# Altium PCB breeze_pcb.PcbDoc (part 1 of 2)
Units mil, origin at the board's own origin, x right, y up, seen from the top; angles counter-clockwise.
Board outline 3667.19 x 3670.52 mil, 4 copper layers (Top Layer, GND, VCC, Bottom Layer); 124 components, 98 nets, 467 pads, 191 vias.
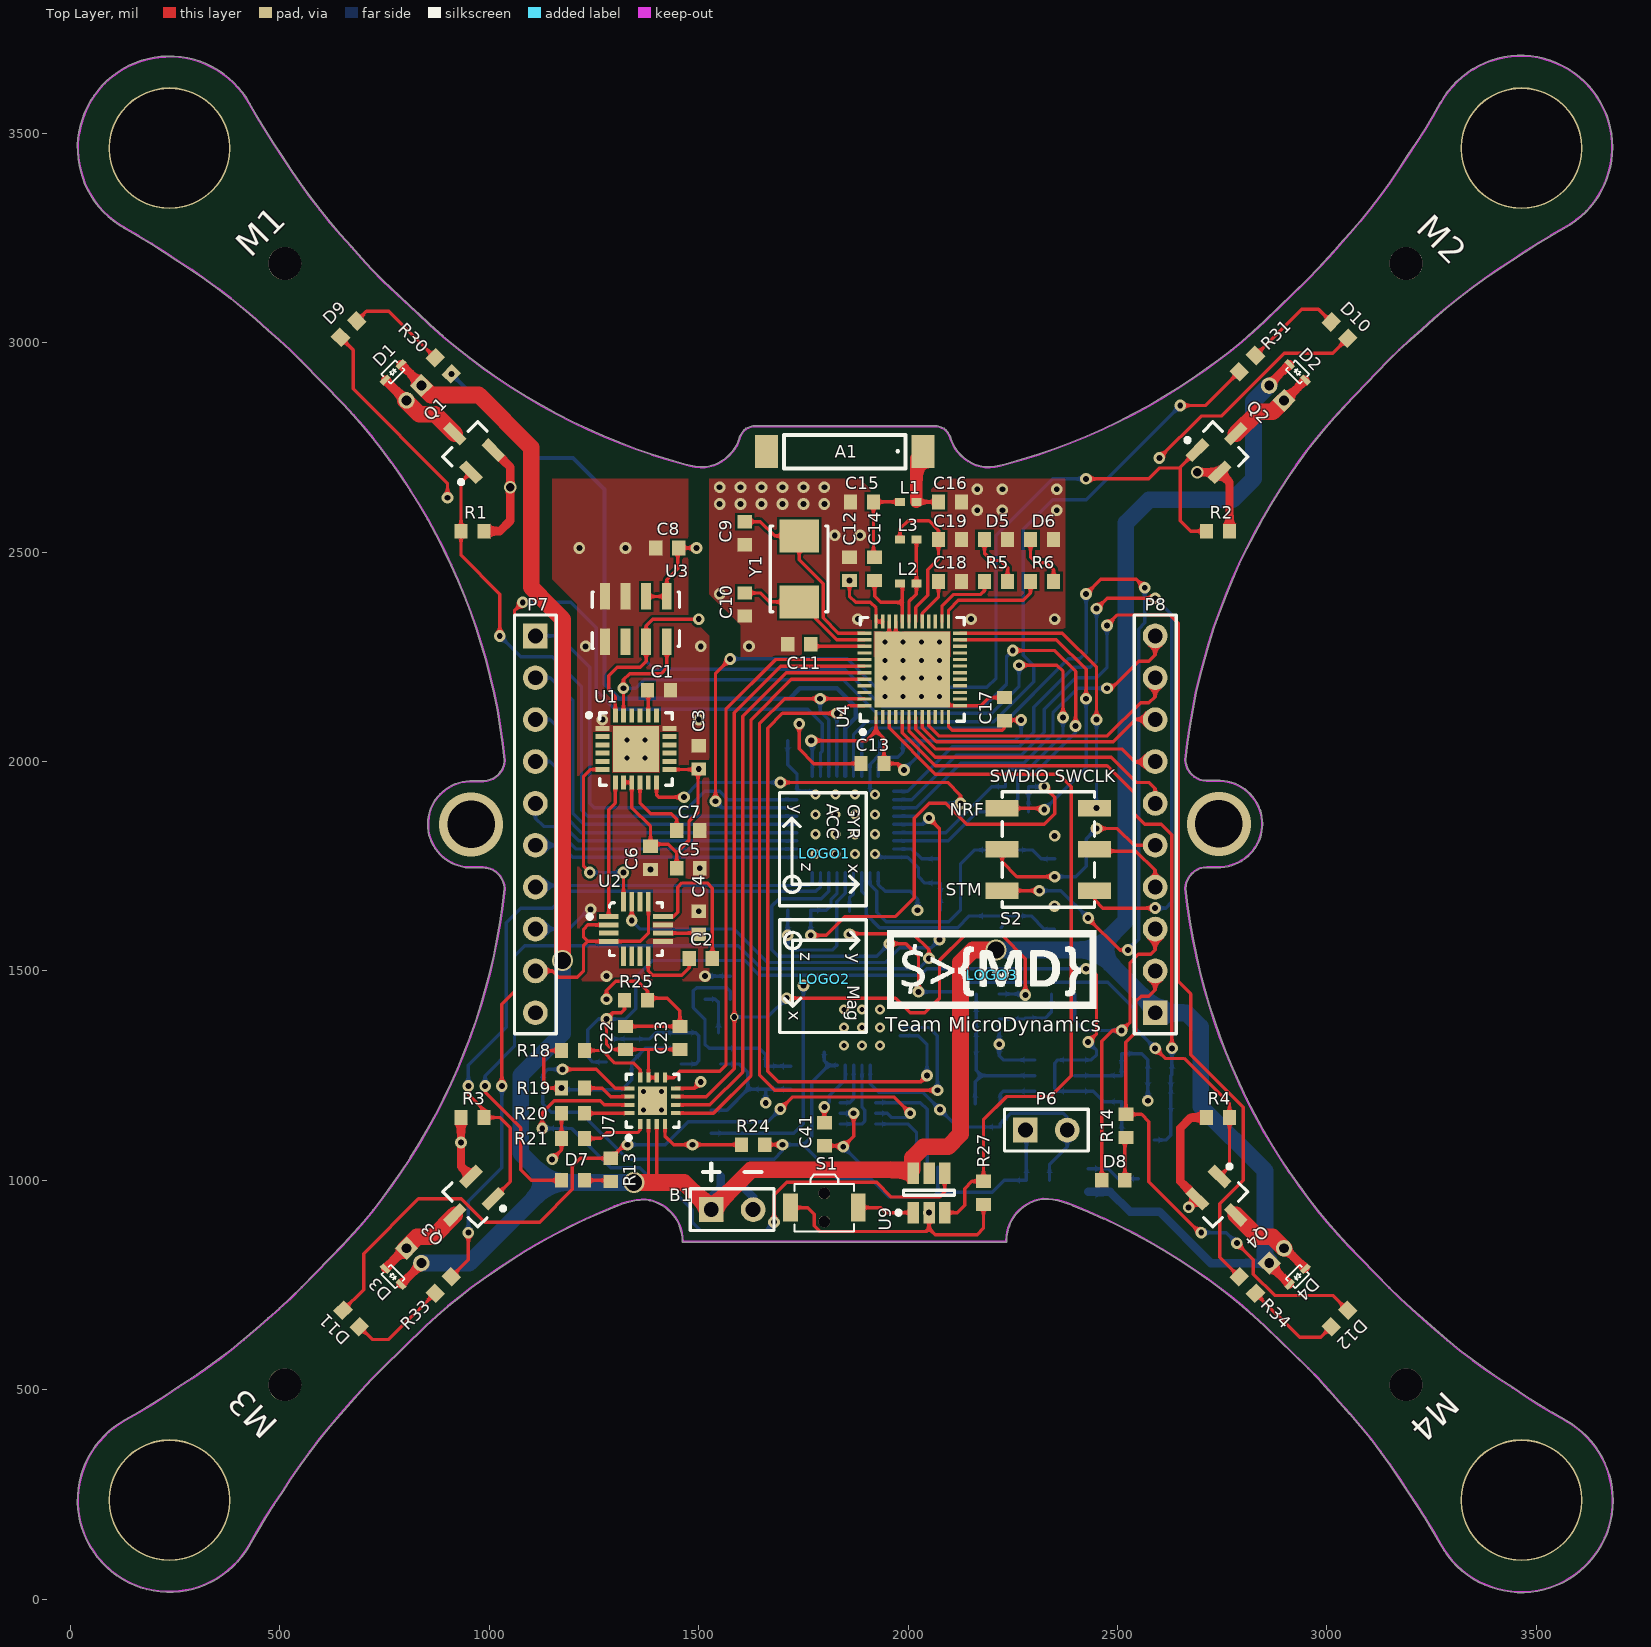
[diagram p0: Top Layer view]
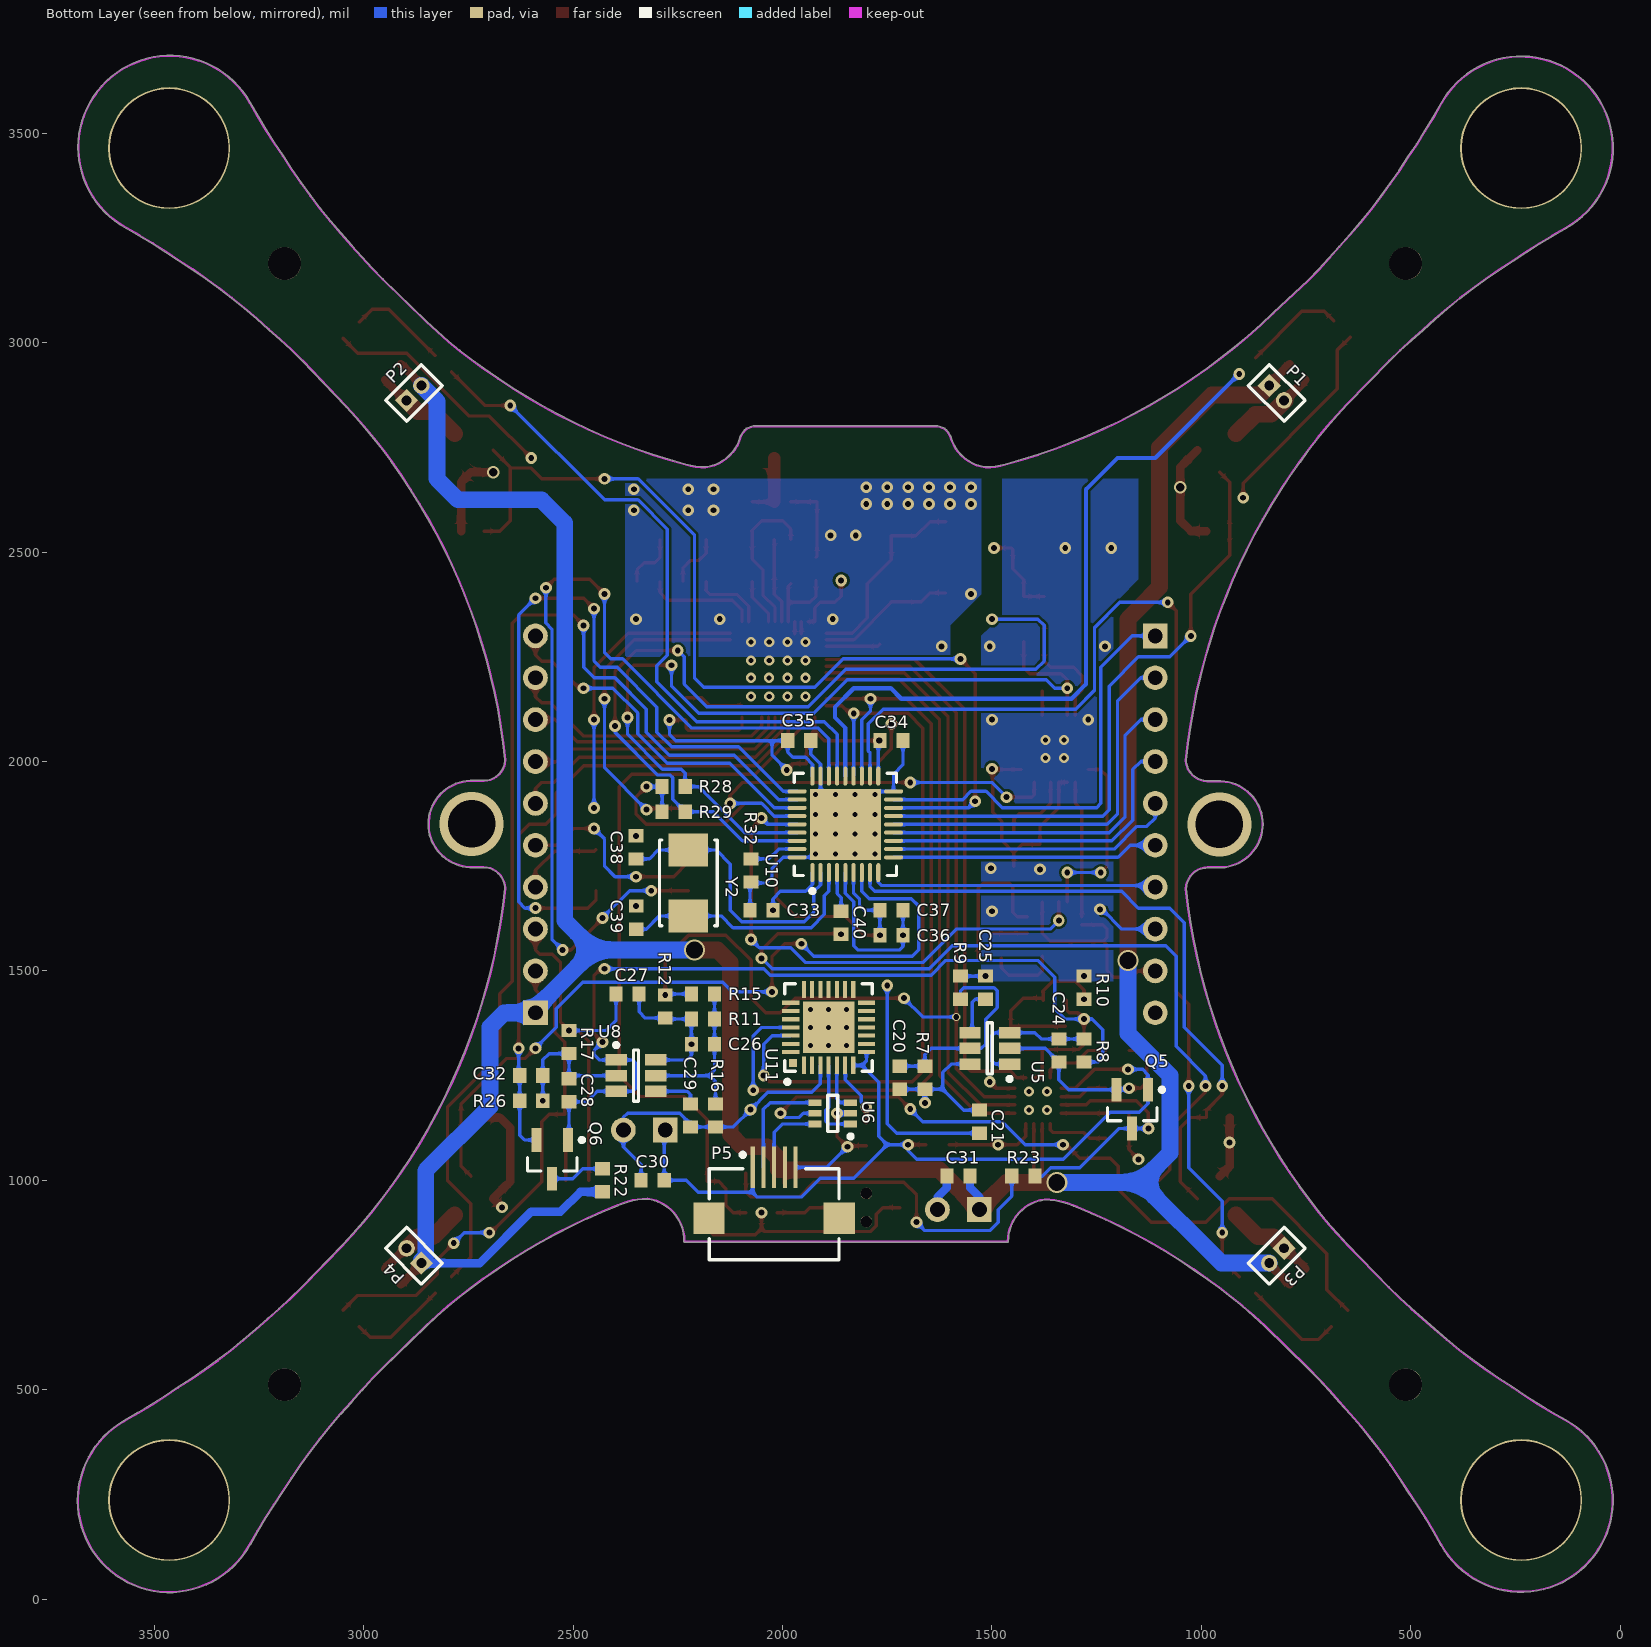
[diagram p1: Bottom Layer view, seen from below]
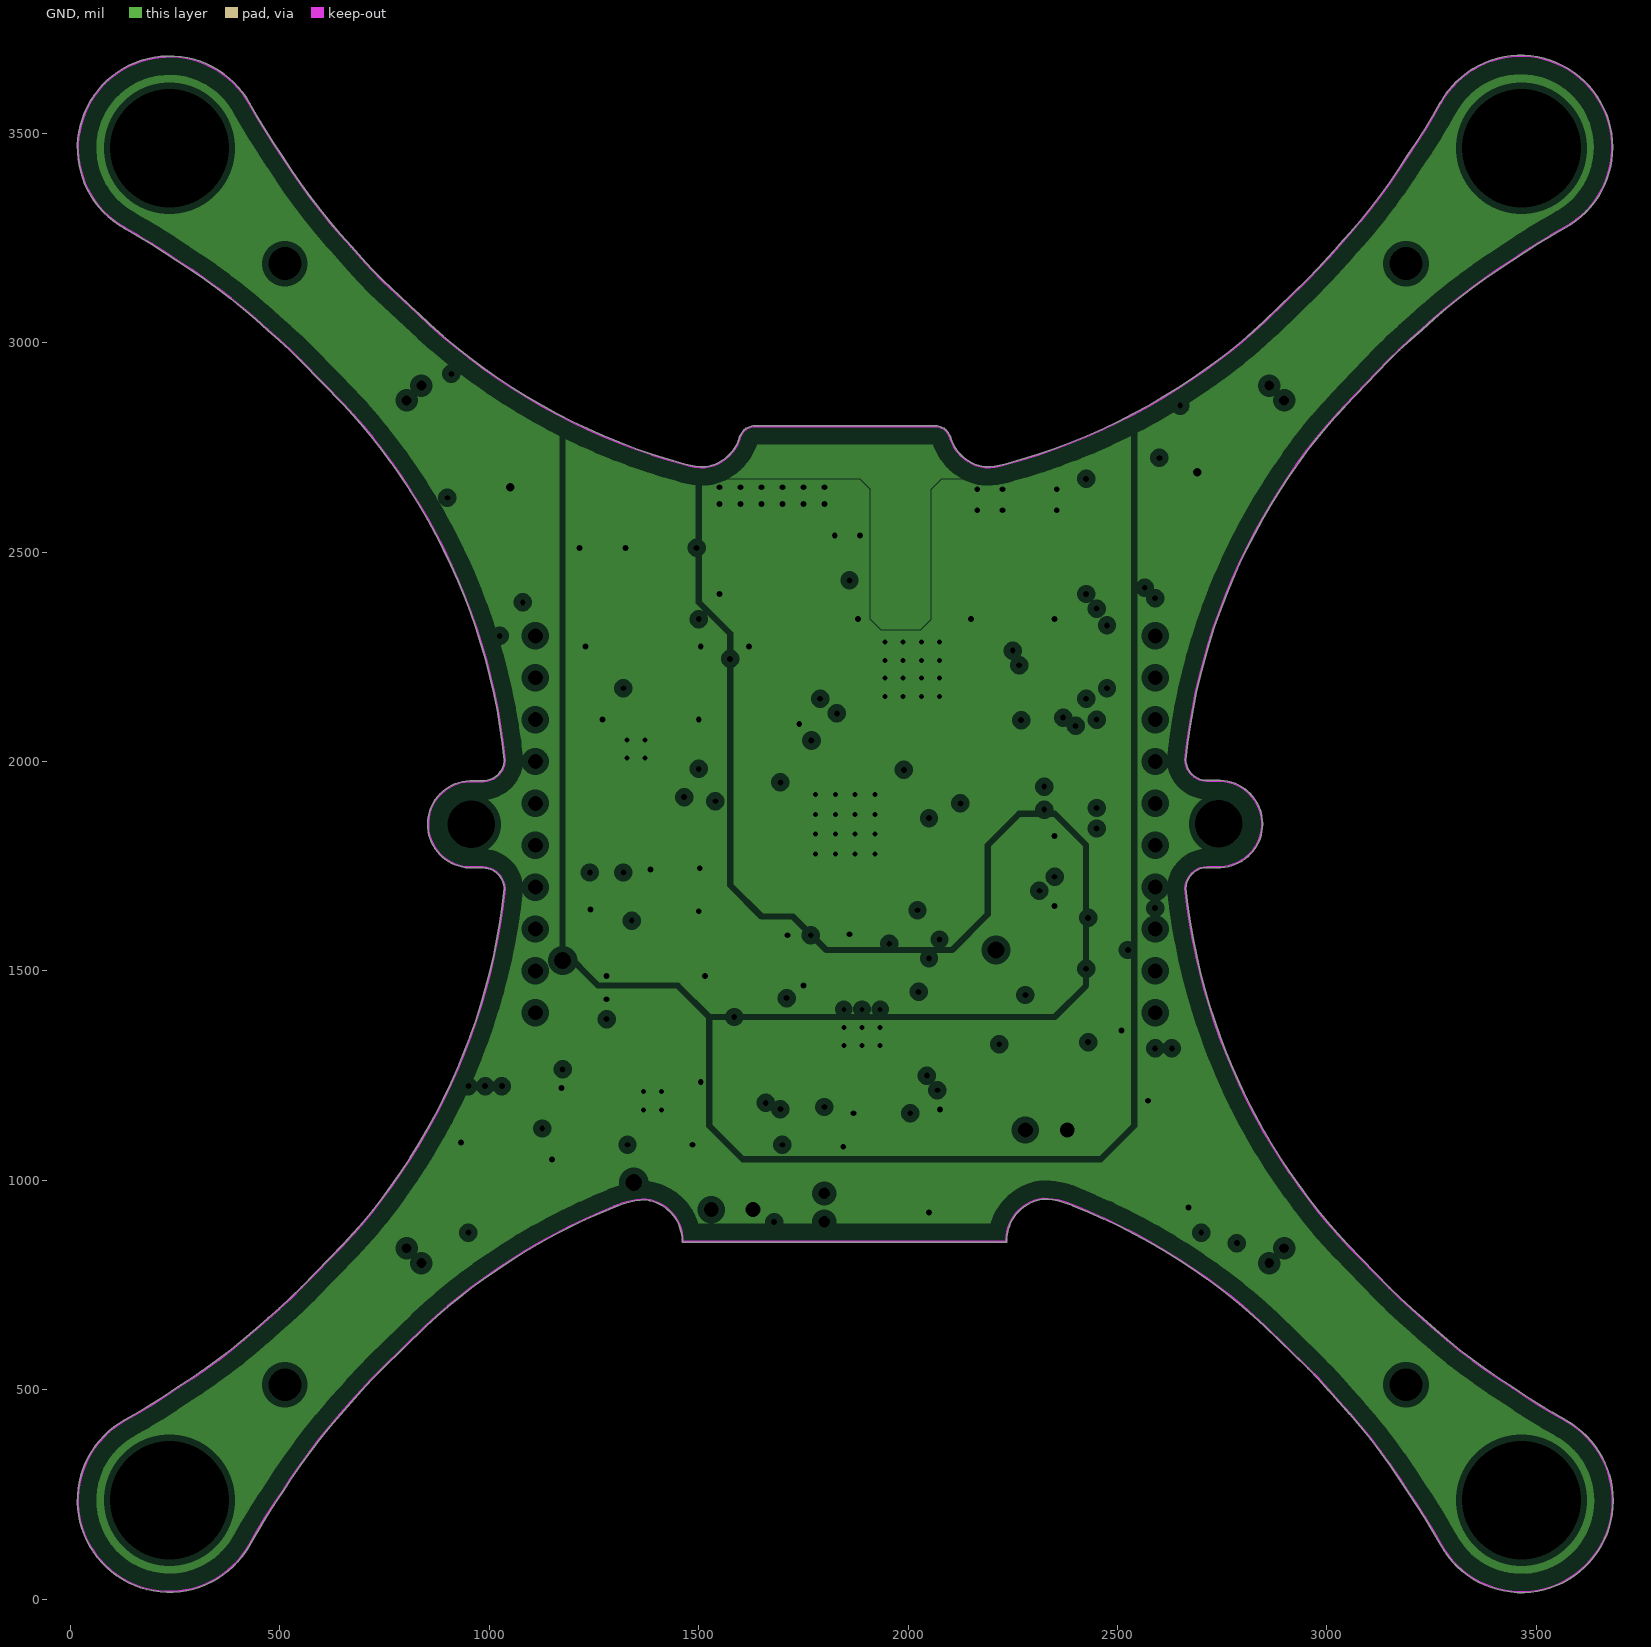
[diagram p2: GND, clearances drawn from the general rule]
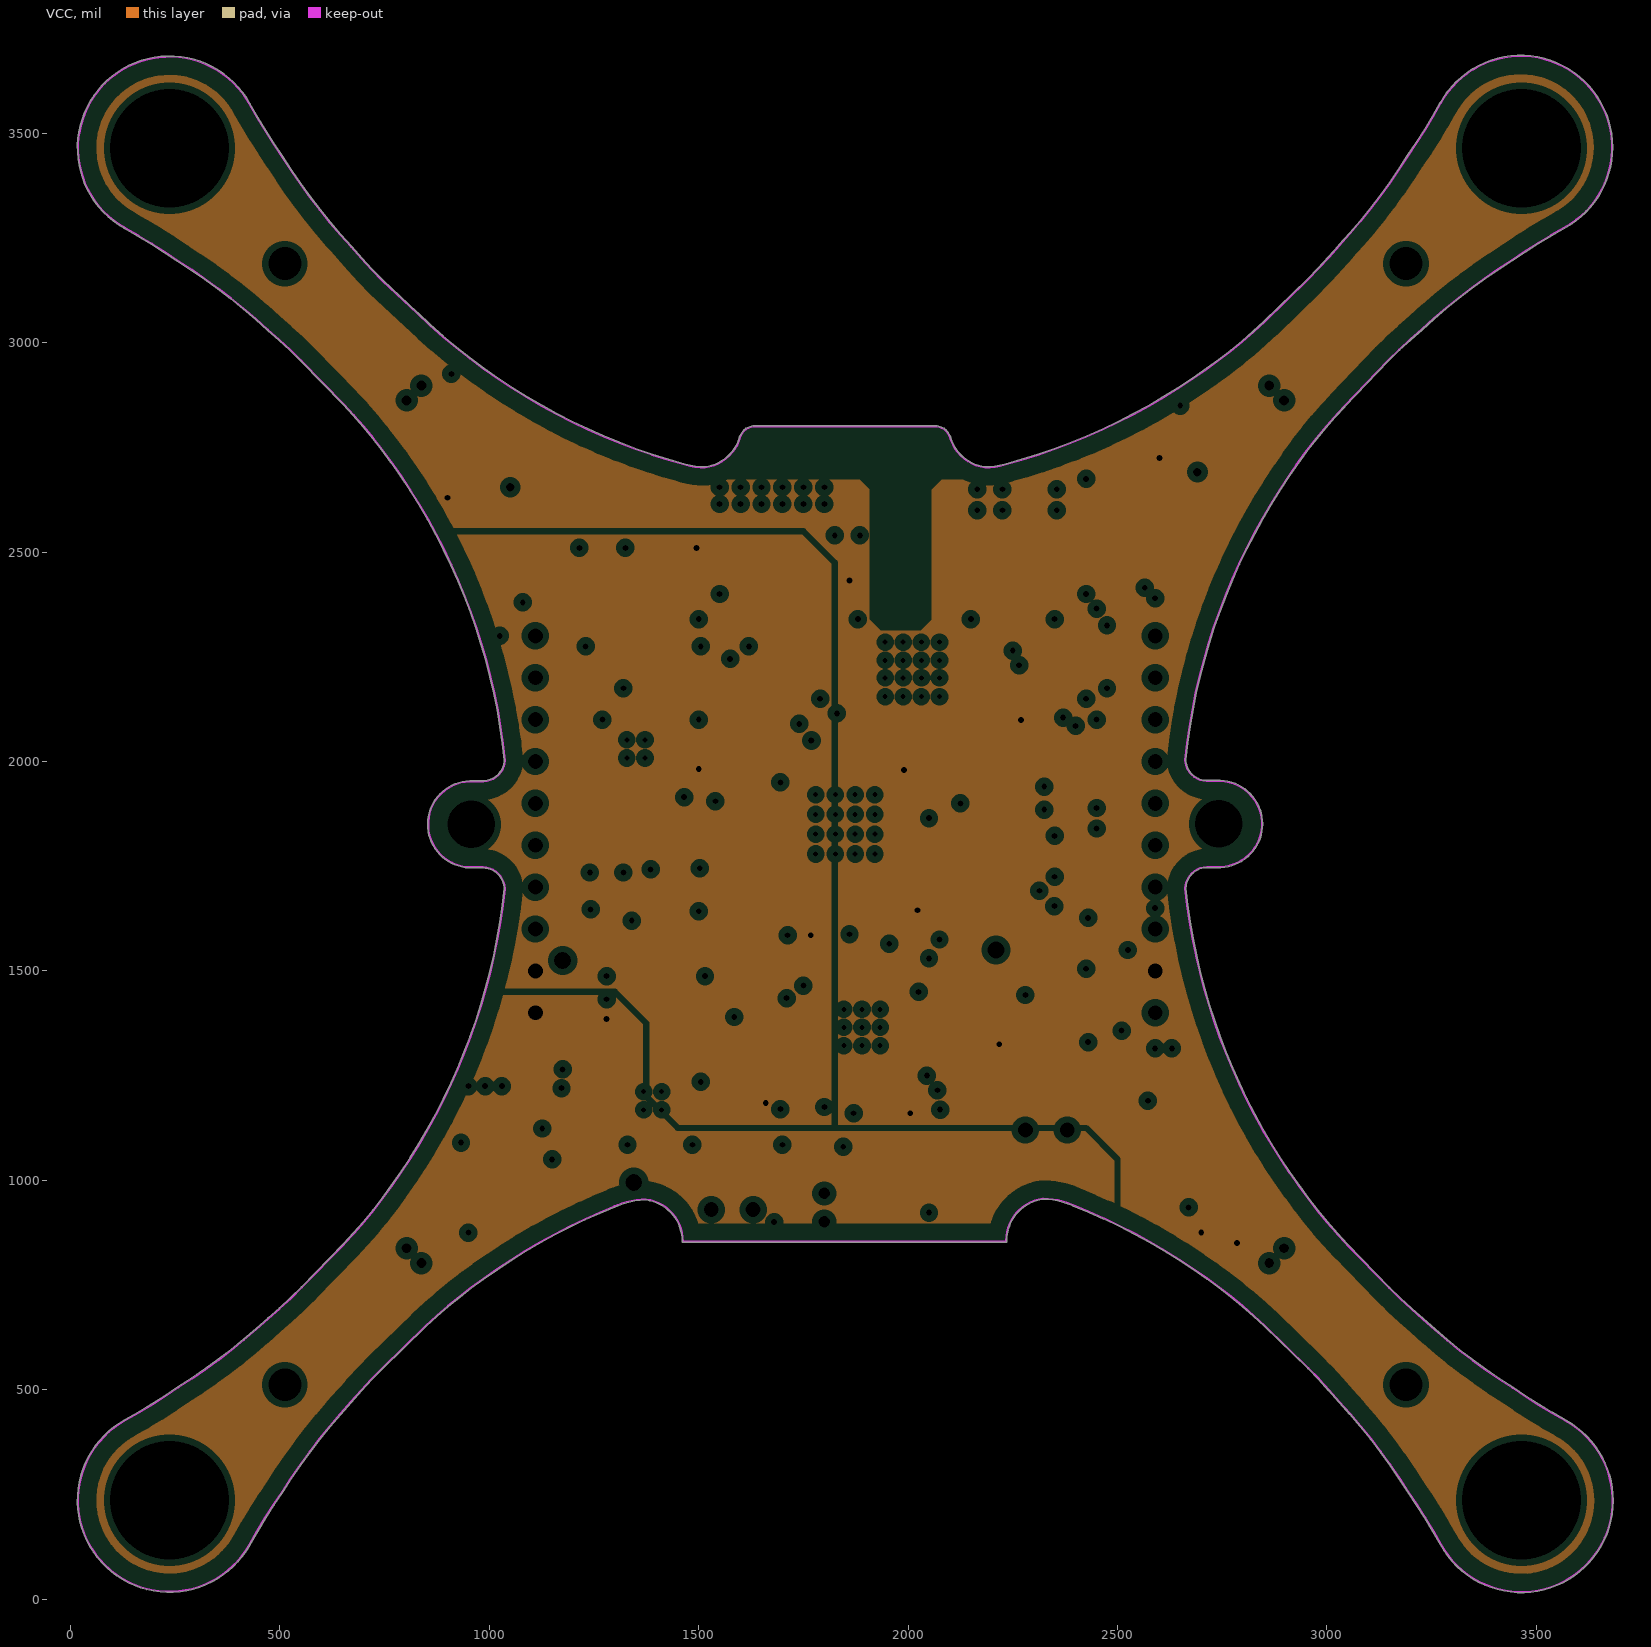
[diagram p3: VCC, clearances drawn from the general rule]

## Layer stack, top to bottom
Top Solder: solder mask 0.4, Solder Resist, Dk 3.5
Top Layer: signal copper 1.4
Dielectric 1: core 12.6, FR-4, Dk 4.8
GND: plane copper 1.4
Dielectric 2: prepreg 12.6, FR-4, Dk 4.8
VCC: plane copper 1.4
Dielectric 3: core 12.6, FR-4, Dk 4.8
Bottom Layer: signal copper 1.4
Bottom Solder: solder mask 0.4, Solder Resist, Dk 3.5

## Board outline
130.48,428.46 cw(c131.44,426.72) 130.49,428.47 ccw(c-590.71,1731.93) 256.84,506.86 cw(c257.97,505.23) 256.9,506.89 cw(c257.98,505.23) 256.93,506.91 ccw(c-511.97,1731.93) 471.19,671.14 cw(c472.54,669.69) 471.28,671.22 ccw(c-433.23,1731.93) 551.48,745.23 652.34,848.99 ccw(c-236.38,1692.56) 764.57,985.8 cw(c766.55,985.62) 764.94,986.78 ccw(c-432.83,1850.04) 1035.62,1696.7 cw(c1037.6,1696.89) 1035.62,1696.8 ccw(c984.21,1694.53) 985.69,1745.97 ccw(c984.21,1694.53) 985.67,1745.97 985.69,1745.97 985.72,1745.97 985.69,1745.97 952.34,1746.09 cw(c952.35,1748.07) 952.07,1746.11 cw(c956.54,1850.04) 953.07,1954.01 cw(c953.14,1952.03) 953.41,1953.99 986.14,1953.99 cw(c986.46,1952.03) 986.38,1954.01 ccw(c984.49,2005.55) 1036.01,2003.28 cw(c1037.99,2003.19) 1036.04,2003.55 ccw(c-432.83,1850.04) 765.05,2713.88 cw(c765.59,2715.79) 763.97,2714.65 ccw(c-237.56,2008.7) 651.16,2852.27 651.15,2852.27 550.3,2956.03 ccw(c-434.41,1969.33) 470.1,3030.03 cw(c471.36,3031.57) 470.01,3030.11 ccw(c-513.15,1969.33) 255.75,3194.34 cw(c256.8,3196.02) 255.72,3194.36 cw(c256.79,3196.03) 255.66,3194.4 ccw(c-591.89,1969.33) 129.3,3272.8 cw(c130.26,3274.53) 128.6,3273.45 cw(c236.06,3465) 428.66,3570.58 cw(c426.92,3569.63) 428.67,3570.57 ccw(c1732.13,4291.77) 507.06,3444.22 cw(c505.42,3443.09) 507.09,3444.17 cw(c505.43,3443.08) 507.11,3444.13 ccw(c1732.13,4213.03) 671.34,3229.87 cw(c669.89,3228.53) 671.42,3229.78 cw(c1732.13,4134.29) 671.4,3229.81 671.42,3229.78 ccw(c1732.13,4134.29) 745.42,3149.59 828.86,3071.4 828.88,3071.39 828.89,3071.37 ccw(c827.52,3069.94) 828.86,3071.4 828.89,3071.37 ccw(c1849.68,4131.84) 1467.66,2710.34 cw(c1467.16,2708.42) 1467.71,2710.32 ccw(c1514.99,2873.1) 1515.45,2703.6 ccw(c1501.78,2802.56) 1598.46,2777.41 cw(c1600.38,2776.91) 1599.32,2778.58 cw(c1646.3,2755.94) 1611.87,2795.11 cw(c1613.18,2793.62) 1612.94,2795.59 cw(c1635.67,2755.94) 1636.88,2801.63 cw(c1635.67,2755.94) 1636.9,2801.63 1636.85,2801.63 2062.02,2801.63 cw(c2063.23,2755.94) 2085.96,2795.59 cw(c2085.72,2793.62) 2087.03,2795.11 cw(c2052.6,2755.94) 2099.58,2778.58 cw(c2098.52,2776.91) 2100.44,2777.41 ccw(c2197.12,2802.56) 2183.45,2703.6 ccw(c2183.91,2873.1) 2231.18,2710.32 2231.19,2710.32 cw(c2231.74,2708.42) 2231.23,2710.34 ccw(c1850.24,4133.9) 2712.39,2938.75 cw(c2713.55,2937.14) 2713.03,2939.06 ccw(c2006.54,3940.2) 2850.1,3051.48 cw(c2851.47,3050.04) 2850.1,3051.48 2953.86,3152.34 ccw(c1967.16,4137.05) 3027.87,3232.54 cw(c3029.4,3231.28) 3027.95,3232.63 ccw(c1967.17,4215.79) 3192.18,3446.89 cw(c3193.86,3445.84) 3192.2,3446.92 cw(c3193.87,3445.85) 3192.24,3446.98 ccw(c1967.17,4294.53) 3270.63,3573.34 cw(c3272.37,3572.38) 3271.28,3574.04 cw(c3462.83,3466.57) 3682.47,3466.57 cw(c3462.83,3466.57) 3568.41,3273.98 cw(c3567.46,3275.72) 3568.4,3273.97 ccw(c4289.61,1970.51) 3442.05,3195.58 cw(c3440.93,3197.21) 3442,3195.55 cw(c3440.91,3197.21) 3441.97,3195.53 ccw(c4210.87,1970.51) 3227.71,3031.3 cw(c3226.36,3032.75) 3227.62,3031.22 cw(c4132.13,1970.51) 3227.65,3031.24 3227.62,3031.22 ccw(c4132.13,1970.51) 3147.42,2957.22 3147.44,2957.24 3147.42,2957.22 ccw(c4132.13,1970.51) 3147.4,2957.2 3147.42,2957.22 3043.18,2847.53 cw(c3041.75,2848.9) 3042.78,2847.21 cw(c3041.19,2848.39) 3042.63,2847.03 ccw(c3947.95,1987.71) 2934.94,2716.99 cw(c2932.96,2716.84) 2934.95,2716.84 cw(c2932.96,2716.84) 2934.57,2715.68 ccw(c4131.73,1850.83) 2662.86,2004.34 cw(c2660.91,2003.98) 2662.89,2004.07 ccw(c2714.41,2006.34) 2712.52,1954.8 cw(c2712.44,1952.82) 2712.75,1954.78 2745.48,1954.78 cw(c2745.76,1952.81) 2745.83,1954.8 cw(c2742.36,1850.83) 2846.39,1850.83 cw(c2742.36,1850.83) 2746.83,1746.89 cw(c2746.55,1748.86) 2746.56,1746.87 2713.2,1746.76 cw(c2714.69,1695.32) 2713.23,1746.76 2713.2,1746.76 2713.18,1746.76 2713.2,1746.76 ccw(c2714.69,1695.32) 2663.28,1697.59 cw(c2661.3,1697.68) 2663.27,1697.48 ccw(c4131.73,1850.83) 2934.93,986.22 cw(c2934.49,984.29) 2936.11,985.43 ccw(c3937.64,1691.38) 3048.92,847.81 cw(c3047.48,846.45) 3048.92,847.81 3149.78,744.05 ccw(c4134.49,1730.75) 3229.98,670.04 ccw(c4134.49,1730.75) 3230.01,670.02 3229.98,670.04 cw(c3228.72,668.51) 3230.07,669.96 ccw(c4213.23,1730.75) 3444.33,505.73 cw(c3443.28,504.05) 3444.36,505.71 cw(c3443.29,504.05) 3444.42,505.68 ccw(c4291.97,1730.75) 3570.78,427.28 cw(c3569.82,425.54) 3571.48,426.63 cw(c3464.02,235.08) 3683.65,235.08 cw(c3464.02,235.08) 3271.42,129.5 cw(c3273.16,130.45) 3271.41,129.51 ccw(c1967.95,-591.69) 3193.02,255.86 cw(c3194.65,256.99) 3192.99,255.91 cw(c3194.65,257) 3192.97,255.94 ccw(c1967.95,-512.95) 3028.74,470.2 cw(c3030.19,471.55) 3028.66,470.3 ccw(c1967.95,-434.21) 2954.65,550.5 2954.66,550.49 2954.65,550.5 2850.89,651.35 ccw(c2007.32,-237.36) 2713.27,764.16 cw(c2714.41,765.78) 2713.23,764.19 ccw(c1850.24,-433.03) 2392.79,939.46 cw(c2393.52,941.31) 2392.13,939.89 cw(c2392.76,941.77) 2391.95,939.96 ccw(c2322.93,785.14) 2322.33,954.65 cw(c2322.33,956.63) 2321.93,954.69 cw(c2321.54,956.63) 2321.81,954.67 ccw(c2335.35,855.69) 2235.45,855.58 cw(c2233.47,855.58) 2235.45,855.58 cw(c2233.47,855.58) 2235.29,854.79 cw(c2233.47,854.01) 2235.45,854.01 cw(c2233.47,854.01) 2233.47,852.02 1462.72,852.02 cw(c1462.67,854.01) 1460.69,854.01 cw(c1462.67,854.01) 1460.69,854.03 cw(c1360.79,854.11) 1460.69,854.01 1460.69,854.03 ccw(c1360.79,854.11) 1460.69,854.11 ccw(c1360.79,854.11) 1374.46,953.07 ccw(c1374,783.57) 1306.89,939.22 cw(c1305.91,940.94) 1306.61,939.09 1306.41,939.01 ccw(c1374,783.57) 1305.38,938.56 cw(c1304.58,940.38) 1304.82,938.41 1300.98,936.95 ccw(c1850.24,-433.03) 986.45,763.79 cw(c985.27,765.39) 986.41,763.77 ccw(c1692.36,-237.76) 848.8,650.96 848.81,650.97 848.8,650.96 ccw(c847.43,652.4) 848.8,650.96 745.03,550.1 745.02,550.09 745.03,550.1 ccw(c1731.73,-434.61) 671.03,469.9 cw(c669.49,471.16) 670.95,469.81 ccw(c1731.73,-513.35) 506.72,255.55 cw(c505.04,256.6) 506.7,255.52 cw(c505.03,256.59) 506.66,255.46 ccw(c1731.73,-592.09) 428.26,129.1 cw(c426.53,130.06) 427.61,128.4 cw(c236.06,235.87)

## Design rules (kind name [scope] priority, off if disabled: settings)
Clearance [All] p1: gap=6
ComponentClearance [All] p1: gap=10 collisioncheckmode=3 verticalgap=100000 showdistances=FALSE
FabricationTestPointUsage TestPointUsage [All] p1: valid=0 allowmultiple=FALSE
FabricationTestpoint Testpoint [All] p1: side=3 testpointundercomponent=TRUE minsize=40 maxsize=100 preferedsize=60 minholesize=0 maxholesize=40 preferedholesize=32 testpointgrid=1 allowsidetop=TRUE allowsidebottom=TRUE usegrid=TRUE gridtolerance=0.01
HoleSize [All] p1: absolutevalues=TRUE maxlimit=300 minlimit=12 maxpercent=80.000 minpercent=20.000
PlaneClearance [All] p1: clearance=15
PlaneConnect [All] p1: planeconnectstyle=Direct reliefexpansion=20 reliefentries=4 reliefconductorwidth=10 reliefairgap=10
PolygonConnect [All] p1: connectstyle=Direct reliefconductorwidth=10 reliefentries=4 polygonreliefangle="90 Angle" airgapwidth=10
RoutingVias [All] p1: holewidth=14 width=28 viastyle="Through Hole" minholewidth=12 minwidth=20 maxholewidth=120 maxwidth=250
SilkToSolderMaskClearance SilkscreenOverComponentPads [IsPad] p1: minsilkscreentomaskgap=10 clearancetoexposedcopper=TRUE
SolderMaskExpansion [All] p1: expansion=4
Width [All] p1: maxlimit=50 minlimit=8 preferedwidth=10
23 further rules are at their usual default settings.

## Classes and differential pairs
component class breeze_controller: C33 C34 C35 C36 C37 C38 C39 C40 C41 D9 D10 D11 D12 P7 P8 R28 R29 R30 R31 R32 R33 R34 S2 U10 U11 Y2
component class breeze_motor: D1 D2 D3 D4 P1 P2 P3 P4 Q1 Q2 Q3 Q4 R1 R2 R3 R4
component class breeze_power: B1 C20 C21 C22 C23 C24 C25 C26 C27 C28 C29 C30 C31 C32 D7 D8 P5 P6 Q5 Q6 R7 R8 R9 R10 R11 R12 R13 R14 R15 R16 R17 R18 R19 R20 R21 R22 R23 R24 R25 R26 R27 S1 U5 U6 U7 U8 U9
component class breeze_sensor: C1 C2 C3 C4 C5 C6 C7 C8 U1 U2 U3
component class breeze_wireless: A1 C9 C10 C11 C12 C13 C14 C15 C16 C17 C18 C19 D5 D6 L1 L2 L3 R5 R6 U4 Y1

## Components (designator, comment, footprint, x,y, rotation, side; value= is the part's Value field where it differs from the comment)
A1 "AN9520" AN9520 1850,2740 r180 top
B1 "BAT" HDR-1X2 1580,930 r0 top
C1 "CAP-0603" SMD-0603#1 1405,2170 r0 top
C2 "CAP-0603" SMD-0603#1 1505,1530 r180 top
C3 "CAP-0603" SMD-0603#1 1500,2010 r90 top
C4 "CAP-0603" SMD-0603#1 1500,1615 r90 top
C5 "CAP-0603" SMD-0603#1 1475,1745 r0 top
C6 "CAP-0603" SMD-0603#1 1385,1770 r270 top
C7 "CAP-0603" SMD-0603#1 1475,1835 r0 top
C8 "CAP-0603" SMD-0603#1 1425,2510 r180 top
C9 "CAP-0603" SMD-0603#1 1610,2545 r270 top
C10 "CAP-0603" SMD-0603#1 1610,2375 r270 top
C11 "CAP-0603" SMD-0603#1 1740,2280 r180 top
C12 "CAP-0603" SMD-0603#1 1860,2460 r90 top
C13 "CAP-0603" SMD-0603#1 1915,1995 r180 top
C14 "CAP-0603" SMD-0603#1 1920,2460 r90 top
C15 "CAP-0603" SMD-0603#1 1890,2620 r180 top
C16 "CAP-0603" SMD-0603#1 2100,2620 r0 top
C17 "CAP-0603" SMD-0603#1 2230,2125 r90 top
C18 "CAP-0603" SMD-0603#1 2100,2430 r0 top
C19 "CAP-0603" SMD-0603#1 2100,2530 r0 top
C20 "CAP-0603" SMD-0603#1 1720,1245 r90 bottom
C21 "CAP-0603" SMD-0603#1 1530,1140 r270 bottom
C22 "CAP-0603" SMD-0603#1 1325,1340 r90 top
C23 "CAP-0603" SMD-0603#1 1455,1340 r90 top
C24 "CAP-0603" SMD-0603#1 1340,1310 r270 bottom
C25 "CAP-0603" SMD-0603#1 1515,1460 r90 bottom
C26 "CAP-0603" SMD-0603#1 2190,1325 r180 bottom
C27 "CAP-0603" SMD-0603#1 2370,1445 r0 bottom
C28 "CAP-0603" SMD-0603#1 2510,1215 r90 bottom
C29 "CAP-0603" SMD-0603#1 2220,1155 r270 bottom
C30 "CAP-0603" SMD-0603#1 2310,1000 r0 bottom
C31 "CAP-0603" SMD-0603#1 1580,1010 r0 bottom
C32 "CAP-0603" SMD-0603#1 2600,1250 r180 bottom
C33 "CAP-0603" SMD-0603#1 2050,1645 r0 bottom
C34 "CAP-0603" SMD-0603#1 1740,2050 r180 bottom
C35 "CAP-0603" SMD-0603#1 1960,2050 r180 bottom
C36 "CAP-0603" SMD-0603#1 1740,1585 r180 bottom
C37 "CAP-0603" SMD-0603#1 1740,1645 r180 bottom
C38 "CAP-0603" SMD-0603#1 2350,1795 r90 bottom
C39 "CAP-0603" SMD-0603#2 2340,1600 r90 bottom
C40 "CAP-0603" SMD-0603#1 1860,1615 r270 bottom
C41 "CAP-0603" SMD-0603#1 1800,1110 r270 top
D1 "BAT54KFILM" SOD-523 770,2930 r45 top
D2 "BAT54KFILM" SOD-523 2930,2930 r135 top
D3 "BAT54KFILM" SOD-523 770,770 r315 top
D4 "BAT54KFILM" SOD-523 2930,770 r225 top
D5 "LED-0603" SMD-0603#1 2210,2530 r0 top
D6 "LED-0603" SMD-0603#1 2320,2530 r0 top
D7 "LED-0603" SMD-0603#1 1200,1000 r180 top
D8 "LED-0603" SMD-0603#1 2490,1000 r180 top
D9 "LED-0603" SMD-0603#3 690,3020 r45 top
D10 "LED-0603" SMD-0603#1 3030,3030 r135 top
D11 "LED-0603" SMD-0603#1 670,670 r315 top
D12 "LED-0603" SMD-0603#1 3030,670 r225 top
L1 "IND-0402" SMD-0402 2000,2620 r0 top
L2 "IND-0402" SMD-0402 2000,2425 r0 top
L3 "IND-0402" SMD-0402 2000,2530 r180 top
LOGO1 "Comment" LOGO_ACC_GYR 1800,1780 r0 top
LOGO2 "Comment" LOGO_MAG 1800,1480 r0 top
LOGO3 "Comment" LOGO_TEAM_OVERLAY 2200,1490 r0 top
P1 "Motor1" HDRM-1X2#1 861.72,1302.28 r225 bottom
P2 "Motor2" HDRM-1X2#2 2880,2880 r135 bottom
P3 "Motor3" HDRM-1X2#2 820,820 r315 bottom
P4 "Motor4" HDRM-1X2#2 2880,820 r45 bottom
P5 "USB_MICRO" USB_MICRO 2020,920 r270 bottom
P6 "HDR-1X2" HDR-1X2 2330,1120 r0 top
P7 "HDR-1X10" HDR-1X10 1110,1850 r270 top
P8 "HDR-1X10" HDR-1X10 2590,1850 r90 top
Q1 "SI2302" SOT-23 950,2750 r135 top
Q2 "SI2302" SOT-23 2750,2750 r45 top
Q3 "SI2302" SOT-23 950,950 r225 top
Q4 "SI2302" SOT-23 2750,950 r315 top
Q5 "2N7002" SOT-23 1165,1170 r270 bottom
Q6 "2N7002" SOT-23 2550,1050 r270 bottom
R1 "RES-0603" SMD-0603#1 960,2550 r0 top
R2 "RES-0603" SMD-0603#1 2740,2550 r0 top
R3 "RES-0603" SMD-0603#1 960,1150 r180 top
R4 "RES-0603" SMD-0603#1 2740,1150 r180 top
R5 "RES-0603" SMD-0603#1 2210,2430 r0 top
R6 "RES-0603" SMD-0603#1 2320,2430 r0 top
R7 "RES-0603" SMD-0603#1 1660,1245 r90 bottom
R8 "RES-0603" SMD-0603#1 1280,1310 r90 bottom
R9 "RES-0603" SMD-0603#1 1575,1460 r90 bottom
R10 "RES-0603" SMD-0603#1 1280,1460 r90 bottom
R11 "RES-0603" SMD-0603#1 2190,1385 r180 bottom
R12 "RES-0603" SMD-0603#1 2280,1415 r90 bottom
R13 "RES-0603" SMD-0603#1 1290,1025 r270 top
R14 "RES-0603" SMD-0603#1 2520,1130 r270 top
R15 "RES-0603" SMD-0603#1 2190,1445 r0 bottom
R16 "RES-0603" SMD-0603#1 2160,1155 r270 bottom
R17 "RES-0603" SMD-0603#1 2510,1330 r90 bottom
R18 "RES-0603" SMD-0603#1 1200,1310 r180 top
R19 "RES-0603" SMD-0603#1 1200,1220 r180 top
R20 "RES-0603" SMD-0603#1 1200,1160 r180 top
R21 "RES-0603" SMD-0603#1 1200,1100 r180 top
R22 "RES-0603" SMD-0603#1 2430,1000 r90 bottom
R23 "RES-0603" SMD-0603#1 1425,1010 r0 bottom
R24 "RES-0603" SMD-0603#1 1630,1085 r180 top
R25 "RES-0603" SMD-0603#1 1350,1430 r0 top
R26 "RES-0603" SMD-0603#1 2600,1190 r180 bottom
R27 "RES-0603" SMD-0603#1 2180,970 r270 top
R28 "RES-0603" SMD-0603#1 2260,1940 r180 bottom
R29 "RES-0603" SMD-0603#1 2260,1880 r180 bottom
R30 "RES-0603" SMD-0603#1 890,2945 r315 top
R31 "RES-0603" SMD-0603#1 2810,2950 r225 top
R32 "RES-0603" SMD-0603#1 2075,1740 r270 bottom
R33 "RES-0603" SMD-0603#1 890,750 r45 top
R34 "RES-0603" SMD-0603#1 2810,750 r135 top
S1 "SKRELGE010" SKRELGE010 1800,935 r0 top
S2 "MSS-22D18G2" MSS-22D18G2 2335,1790 r0 top
U1 "MPU6050" QFN-24 1350,2030 r0 top
U2 "HMC5883L" LPCC-16 1350,1600 r0 top
U3 "MS5611" MS5611 1350,2340 r270 top
U4 "nRF51822" QFN-48 2010,2220 r90 top
U5 "TPS79301DBVR" SOT-23-6 1505,1315 r0 bottom
U6 "NUF2221W1T2" SOT-363 1880,1160 r0 bottom
U7 "BQ24075RGTR" VQFN-16 1390,1190 r90 top
U8 "TPS79301DBVR" SOT-23-6 2350,1250 r180 bottom
U9 "MAX16054" SOT-23-6 2050,970 r90 top
U10 "STM32F103T6U6" VFQFPN-36 1850,1850 r90 bottom
U11 "CP2102" QFN-28 1890,1365 r90 bottom
Y1 "XTAL-5032" SMD-5032 1740,2460 r270 top
Y2 "XTAL-5032" SMD-5032 2225,1710 r270 bottom

## Footprints (in the part's own frame and the unit in brackets; to place one, negate y for a bottom-side part, rotate by r counter-clockwise, add the part's x,y. Pads: shape width x height; smd on the part's side, far side on the other; paste and mask are expansions set on the pad)
AN9520 [mm] "AN9520"
  rect 1.4x2 smd: 1(-4.725,0) 2(4.775,0)
  silkscreen extent -3.66,-1.02 3.71,1.02
HDR-1X2 [mm] "HDR-1X2"
  rect 1.5x1.5 hole 0.9: 1(-1.27,0)
  round 1.5 hole 0.9: 2(1.27,0)
  silkscreen extent -2.54,-1.27 2.54,1.27
HDR-1X10 [mm] "HDR-1X10"
  rect 1.5x1.5 hole 0.9: 1(-11.43,0)
  round 1.5 hole 0.9: 2(-8.89,0) 3(-6.35,0) 4(-3.81,0) 5(-1.27,0) 6(1.27,0) 7(3.81,0) 8(6.35,0) 9(8.89,0) 10(11.43,0)
  silkscreen extent -12.7,-1.27 12.7,1.27
HDRM-1X2#1 [mm] "HDRM-1X2"
  rect 1x1 hole 0.6: 1(-28.222,29.086)
  round 1 hole 0.6: 2(-26.952,29.086)
  silkscreen extent -29.12,28.19 -26.05,29.99
HDRM-1X2#2 [mm] "HDRM-1X2"
  rect 1x1 hole 0.6: 1(-0.635,0)
  round 1 hole 0.6: 2(0.635,0)
  silkscreen extent -1.54,-0.9 1.54,0.9
LOGO_ACC_GYR [mil] "Orientation of Axes of MPU6050"
  silkscreen extent -107,-124 100,145
LOGO_MAG [mil] "Orientation of Axes of HMC5883L"
  silkscreen extent -107,-127 100,142
LOGO_TEAM_OVERLAY [mil] "Logo for Team MicroDynamics on overlay layer"
  silkscreen extent -250,-79 250,107
LPCC-16 [mm] "LCC, 16-Pins, Body 3.00x3.00mmx0.90mm, Pitch 0.50mm, IPC Medium Density"
  rect 1.2x0.3 smd: 1(-1.65,0.75) 2(-1.65,0.25) 3(-1.65,-0.25) 4(-1.65,-0.75) 9(1.65,-0.75) 10(1.65,-0.25) 11(1.65,0.25) 12(1.65,0.75)
  rect 0.3x1.2 smd: 5(-0.75,-1.65) 6(-0.25,-1.65) 7(0.25,-1.65) 8(0.75,-1.65) 13(0.75,1.65) 14(0.25,1.65) 15(-0.25,1.65) 16(-0.75,1.65)
  silkscreen extent -2.92,-1.6 1.6,1.6
MS5611 [mm] "MS5611"
  rect 1.6x0.6 smd: 1(-1.377,1.875) 2(-1.377,0.625) 3(-1.377,-0.625) 4(-1.377,-1.875) 5(1.377,-1.875) 6(1.377,-0.625) 7(1.377,0.625) 8(1.377,1.875)
  silkscreen extent -1.65,-2.65 1.78,2.65
MSS-22D18G2 [mm] "MSS-22D18G2"
  rect 2x1 smd: 1(-2.8,0) 2(-2.8,2.5) 3(-2.8,-2.5) 4(2.8,0) 5(2.8,2.5) 6(2.8,-2.5)
  silkscreen extent -2.8,-3.5 2.8,3.5
QFN-24 [mm] "QFN, 24-Leads, Body 4.00x4.00mm, Pitch 0.50mm, Thermal Pad 2.80x2.80mm, IPC Medium Density"
  rect 0.85x0.3 smd: 1(-2.025,1.25) 2(-2.025,0.75) 3(-2.025,0.25) 4(-2.025,-0.25) 5(-2.025,-0.75) 6(-2.025,-1.25) 13(2.025,-1.25) 14(2.025,-0.75) 15(2.025,-0.25) 16(2.025,0.25) 17(2.025,0.75) 18(2.025,1.25)
  rect 0.3x0.85 smd: 7(-1.25,-2.025) 8(-0.75,-2.025) 9(-0.25,-2.025) 10(0.25,-2.025) 11(0.75,-2.025) 12(1.25,-2.025) 19(1.25,2.025) 20(0.75,2.025) 21(0.25,2.025) 22(-0.25,2.025) 23(-0.75,2.025) 24(-1.25,2.025)
  rect 2.8x2.8 smd: 25(0,0)
  silkscreen extent -2.97,-2.2 2.2,2.2
QFN-28 [mm] "QFN, 28-Leads, Body 5.00x5.00mm, Pitch 0.50mm, Thermal Pad 3.13x3.13mm, IPC Medium Density"
  rect 1.05x0.25 smd: 1(-2.3,1.5) 2(-2.3,1) 3(-2.3,0.5) 4(-2.3,0) 5(-2.3,-0.5) 6(-2.3,-1) 7(-2.3,-1.5) 15(2.3,-1.5) 16(2.3,-1) 17(2.3,-0.5) 18(2.3,0) 19(2.3,0.5) 20(2.3,1) 21(2.3,1.5)
  rect 0.25x1.05 smd: 8(-1.5,-2.3) 9(-1,-2.3) 10(-0.5,-2.3) 11(0,-2.3) 12(0.5,-2.3) 13(1,-2.3) 14(1.5,-2.3) 22(1.5,2.3) 23(1,2.3) 24(0.5,2.3) 25(0,2.3) 26(-0.5,2.3) 27(-1,2.3) 28(-1.5,2.3)
  rect 3.13x3.13 smd: 29(0,0)
  rect 0.5x0.5 smd: 30(-2.159,2.159)
  silkscreen extent -3.42,-2.65 2.65,2.65
QFN-48 [mm] "QFN, 48-Leads, Body 6.00x6.00mm, Pitch 0.40mm, Thermal Pad 4.60x4.60mm, IPC Medium Density"
  rect 0.85x0.2 smd: 1(-2.9,2.2) 2(-2.9,1.8) 3(-2.9,1.4) 4(-2.9,1) 5(-2.9,0.6) 6(-2.9,0.2) 7(-2.9,-0.2) 8(-2.9,-0.6) 9(-2.9,-1) 10(-2.9,-1.4) 11(-2.9,-1.8) 12(-2.9,-2.2) 25(2.9,-2.2) 26(2.9,-1.8) 27(2.9,-1.4) 28(2.9,-1) 29(2.9,-0.6) 30(2.9,-0.2) 31(2.9,0.2) 32(2.9,0.6) 33(2.9,1) 34(2.9,1.4) 35(2.9,1.8) 36(2.9,2.2)
  rect 0.2x0.85 smd: 13(-2.2,-2.9) 14(-1.8,-2.9) 15(-1.4,-2.9) 16(-1,-2.9) 17(-0.6,-2.9) 18(-0.2,-2.9) 19(0.2,-2.9) 20(0.6,-2.9) 21(1,-2.9) 22(1.4,-2.9) 23(1.8,-2.9) 24(2.2,-2.9) 37(2.2,2.9) 38(1.8,2.9) 39(1.4,2.9) 40(1,2.9) 41(0.6,2.9) 42(0.2,2.9) 43(-0.2,2.9) 44(-0.6,2.9) 45(-1,2.9) 46(-1.4,2.9) 47(-1.8,2.9) 48(-2.2,2.9)
  rect 4.6x4.6 smd: 49(0,0)
  silkscreen extent -3.92,-3.15 3.15,3.15
SKRELGE010 [mm] "SKRELGE010"
  round 0.7 hole 0.7: 0(-0.005,0.855) 0(-0.005,-0.855)
  rect 0.9x1.7 smd: 1(-2.055,-0.005) 2(2.055,-0.005)
  silkscreen extent -1.81,-1.44 1.81,2
SMD-0402 [mm] "SMD-0402"
  rect 0.6x0.5 smd: 1(-0.5,0) 2(0.5,0)
SMD-0603#1 [mm] "SMD-0603"
  rect 0.8x0.9 smd: 1(-0.7,0) 2(0.7,0)
SMD-0603#2 [mm] "SMD-0603"
  rect 0.8x0.9 smd: 1(-0.012,0.24) 2(1.388,0.24)
SMD-0603#3 [mm] "SMD-0603"
  rect 0.8x0.9 smd: 1(-0.94,0.688) 2(0.46,0.688)
SMD-5032 [mm] "SMD-5032"
  rect 2x2.4 smd: 1(-2,0) 2(2,0)
  silkscreen extent -2.6,-1.75 2.6,1.75
SOD-523 [mm] "SOD-523"
  rect 0.65x0.3 smd: 1(-0.675,0) 2(0.675,0)
  silkscreen extent -0.6,-0.41 0.6,0.4
SOT-23 [mm] "SOT23, 3-Leads, Body 2.9x1.3mm, Pitch 0.95mm, Lead Span 2.5mm, IPC Low Density"
  rect 1.45x0.6 smd: 1(-1.175,0.95) 2(-1.175,-0.95) 3(1.175,0)
  silkscreen extent -1.3,-1.5 0.7,1.92
SOT-23-6 [mm] "SOT23, 6-Leads, Body 2.9x1.6mm, Pitch 0.95mm, Lead Span 2.7mm, IPC Low Density"
  rect 1.3x0.7 smd: 1(-1.2,0.95) 2(-1.2,0) 3(-1.2,-0.95) 4(1.2,-0.95) 5(1.2,0) 6(1.2,0.95)
  silkscreen extent -1.32,-1.55 0.15,1.97
SOT-363 [mm] "SOT-363, 6-Leads, Body 2.00x2.10mm, Pitch 0.65mm, IPC Medium Density"
  rect 0.8x0.4 smd: 1(-1.075,0.65) 2(-1.075,0) 3(-1.075,-0.65) 4(1.075,-0.65) 5(1.075,0) 6(1.075,0.65)
  silkscreen extent -1.2,-1.1 0.3,1.52
USB_MICRO [mm] "USB_MICRO"
  rect 1.9x1.9 smd: 0(0.277,-3.95) 0(0.277,3.95)
  rect 2.5x0.25 smd: 1(-2.817,-1.3) 2(-2.817,-0.65) 3(-2.817,0) 4(-2.817,0.65) 5(-2.817,1.3)
  silkscreen extent -3.7,-3.94 2.78,3.94
VFQFPN-36 [mm] "QFN, 36-Leads, Body 6.13x6.13mm, Pitch 0.5mm, Thermal Pad 3x3mm, IPC Low Density"
  oval 1.15x0.25 smd: 1(-2.925,2) 2(-2.925,1.5) 3(-2.925,1) 4(-2.925,0.5) 5(-2.925,0) 6(-2.925,-0.5) 7(-2.925,-1) 8(-2.925,-1.5) 9(-2.925,-2) 19(2.925,-2) 20(2.925,-1.5) 21(2.925,-1) 22(2.925,-0.5) 23(2.925,0) 24(2.925,0.5) 25(2.925,1) 26(2.925,1.5) 27(2.925,2)
  oval 0.25x1.15 smd: 10(-2,-2.925) 11(-1.5,-2.925) 12(-1,-2.925) 13(-0.5,-2.925) 14(0,-2.925) 15(0.5,-2.925) 16(1,-2.925) 17(1.5,-2.925) 18(2,-2.925) 28(2,2.925) 29(1.5,2.925) 30(1,2.925) 31(0.5,2.925) 32(0,2.925) 33(-0.5,2.925) 34(-1,2.925) 35(-1.5,2.925) 36(-2,2.925)
  rect 4.3x4.3 smd: 37(0,0)
  silkscreen extent -4.17,-3.1 3.1,3.1
VQFN-16 [mm] "QFN, 16-Leads, Body 3.00x3.00mm, Pitch 0.50mm, Thermal Pad 1.75x1.75mm, IPC Medium Density"
  rect 0.6x0.25 smd: 1(-1.4,0.75) 2(-1.4,0.25) 3(-1.4,-0.25) 4(-1.4,-0.75) 9(1.4,-0.75) 10(1.4,-0.25) 11(1.4,0.25) 12(1.4,0.75)
  rect 0.25x0.6 smd: 5(-0.75,-1.4) 6(-0.25,-1.4) 7(0.25,-1.4) 8(0.75,-1.4) 13(0.75,1.4) 14(0.25,1.4) 15(-0.25,1.4) 16(-0.75,1.4)
  rect 1.75x1.75 smd: 17(0,0)
  silkscreen extent -2.37,-1.6 1.6,1.6

## Part data
A1: "2.4GHz Wireless Communication Antenna"
B1: "Battery"
C1 C2 C3 C4 C5 C6 C7 C8 C9 C10 C11 C12 C13 C14 C15 C16 C17 C18 C19 C20 C21 C22 C23 C24 C25 C26 C27 C28 C29 C30 C31 C32 C33 C34 C35 C36 C37 C38 C39 C40 C41: "Capacitor"
D1 D2 D3 D4: "Schottky Diode"
D5 D6 D7 D8 D9 D10 D11 D12: "LED"
L1 L2 L3: "Inductor"
P1 P4: library part Motor_A, "Motor Header"
P2 P3: library part Motor_B, "Motor Header"
P5: "Micro USB"
P6: "Header 1X2"
P7 P8: "Header 1X10"
Q1 Q2 Q3 Q4 Q5 Q6: "N-Channel Enhancement Mode Field Effect Transistor"
R1 R2 R3 R4 R5 R6 R7 R8 R9 R10 R11 R12 R13 R14 R15 R16 R17 R18 R19 R20 R21 R22 R23 R24 R25 R26 R27 R28 R29 R30 R31 R32 R33 R34: "Resistor"
S1: "Switch"
S2: "Double-Pole, Double-Throw Switch"
U1: "6-axis Motion Tracking IC"
U2: "3-Axis Digital Compass IC"
U3: "High Resolution Altimeter IC"
U4: "Multiprotocol Bluetooth 4.0 low energy/2.4 GHz RF SoC"
U5 U8: "200-mA RF Low-Dropout Regulator"
U6: "USB Upstream Terminator  with ESD Protection"
U7: "1.5-A USB-Friendly Li-Ion Battery Charger and Power-Path Management IC"
U9: "On/Off Controller with Debounce and ±15kV ESD Protection"
U10: "ARM Cortex-M3 MCU"
U11: "Highly-integrated USB-to-UART Bridge Controller"
Y1 Y2: "Passive Crystal Oscillator"

## Free pads (board coordinates)
  round 291.34 hole 283.46: 1(236.22,3464.57) 2(3464.57,3464.57) 3(236.22,236.22) 4(3464.57,236.22)
  round 78.74 hole 78.74: 1(511.81,3188.98) 2(3188.98,3188.98) 3(511.81,511.81) 4(3188.98,511.81)

## Via types
v1: diameter 28, hole 14, Top Layer to Bottom Layer, tented both sides, 133 vias
v2: diameter 24, hole 12, Top Layer to Bottom Layer, tented both sides, 49 vias
v3: diameter 50, hole 40, Top Layer to Bottom Layer, tented both sides, 3 vias
v4: diameter 152.83, hole 113.46, Top Layer to Bottom Layer, 2 vias
v5: diameter 30, hole 20, Top Layer to Bottom Layer, tented both sides, 2 vias
v6: diameter 30, hole 15, Top Layer to Bottom Layer, tented both sides, 1 vias
v7: diameter 20, hole 14, Top Layer to Bottom Layer, tented both sides, 1 vias

## Nets (pads, with @x,y where several pads share a name; then routed paths per layer and width w, separated by ;. In a path a pad name is that pad's centre, name@x,y a point inside that pad or via, vN(x,y) a via of type N, cw(c..) or ccw(c..) an arc to the next point about the centre after c; other vN are vias at no path point)
+BAT: B1.1 C31.1 D1.2 D2.2 D3.2 D4.2 P1.1 P2.2 P3.2 P4.1 P8.1 R22.1 U7.2 U7.3 U9.6 | length 8138.9
  Top Layer w8: 1380.16,995.16 U7.2@1380.16,1134.88 ; 1399.84,995.16 U7.3@1399.84,1134.88
  Top Layer w20: D3.2@788.79,751.21 P3.2@837.68,800.1 ; D1.2@788.79,2948.79 P1.1@837.68,2899.9 ; P4.1@2862.32,800.1 D4.2@2911.21,751.21 ; P2.2@2862.32,2899.9 D2.2@2911.21,2948.79
  Top Layer w40: P1.1@837.68,2897.68 860.36,2875 975,2875 1100,2750 1100,2416.57 1120,2396.57 1120,2395 1175,2340 v3(1175,1525) ; v3(1345,995) 1465,995 B1.1@1530,930 1625,1025 2010.22,1025 2010.22,1053.6 2036.62,1080 2095,1080 2125,1110 2125,1520 2155,1550 v3@2200,1550
  Bottom Layer w20: B1.1@1530,930 1530,960 1552.44,982.44 C31.1@1552.44,1010 ; R22.1@2430,972.44 2482.56,972.44 2530,925 2600,925 2722.68,802.32 P4.1@2862.32,802.32
  Bottom Layer w40: P3.2@837.68,802.32 952.32,802.32 1145,995 ; v3(1175,1525) 1175,1350 1075,1250 1075,1065 1145,995 ; v3(1345,995) 1145,995 ; v3(2210,1550) 2450,1550 ; P8.1@2590,1400 2665,1400 2698.58,1366.42 2698.58,1176.42 2851.99,1023.01 2851.99,818.75 2862.32,808.42 P4.1@2862.32,802.32 ; P8.1@2590,1410 2450,1550 ; P2.2@2862.32,2897.68 2825,2860.36 2825,2675 2775,2625 2575,2625 2520,2570 2520,1620 2450,1550
AGND: C1.2 C3.2 C4.2 C5.2 C6.2 C7.2 C8.2 C21.2 C25.2 C36.2 C37.2 C38.2 C39.2 P7.8 R9.2 R10.2 U1.1 U1.18 U1.25 U2.9 U2.11 U3.3 U3.4 U3.5 U10.5 | length 1166.2
  Bottom Layer w8: P7.8@1110,1600 1190,1600 1237,1647 v1(1242,1647) ; v1(1515,1487.56) R9.2@1575,1487.56 ; C21.2@1530,1112.44 1727.44,1112.44 1750,1135 v1(1750,1465) ; C37.2@1712.44,1645 v1(1712.44,1585) 1712.44,1557.56 1720,1550 1820,1550 1830,1560 1830,1665.17 1850,1685.17 U10.5@1850,1734.84
  other v1: 1280,1487.56 1500,1642.56 2349.44,1654.65 1385,1742.44 1502.56,1745 2350,1822.56 1270,2100 1500,2100 1230,2275 1505,2275 1215,2510 1325,2510
  other v2: 1328.35,2008.35 1371.65,2008.35 1328.35,2051.65 1371.65,2051.65
DGND: C9.2 C10.2 C11.2 C12.2 C13.2 C15.2 C16.2 C17.2 C18.2 C19.2 C27.2 C29.2 C30.2 C33.2 C34.2 C35.2 C40.2 C41.2 D5.2 D6.2 D7.2 D8.2 P5.5 P6.2 P8.3 R16.2 R17.2 R32.2 U4.13 U4.33 U4.34 U4.49 U6.2 U10.18 U10.26 U10.36 U10.37 U11.3 U11.29 | length 4836.3
  Top Layer w8: v1(990,1225) 990,1210 1075,1125 1075,1025 1100,1000 D7.2@1172.44,1000 ; v1(1740,2090) 1740,2030 1775,1995 C13.2@1887.44,1995 ; C41.2@1800,1082.44 v1@1842.56,1082.44 ; v1(1845,1080) 1870,1105 v1(1870,1160) ; v1(1860,1587.44) 1861.56,1589 2011,1589 2050,1550 v1(2050,1530) ; U4.49@1954.88,2305 U4.34@1954.88,2334.17 ; U4.49@1970.63,2305 U4.33@1970.63,2334.17 ; U4.49@2096.61,2133.39 U4.13@2124.17,2133.39 2173.39,2133.39 2192.56,2152.56 C17.2@2230,2152.56 ; D8.2@2462.44,1000 2462.44,1332.44 2487.56,1357.56 v1(2510,1357.56) 2530,1377.56 2530,1520 2550,1540 2580,1540 2590,1550 P8.3@2590,1600
  Bottom Layer w8: v1(990,1225) 990,1250 1060,1320 1060,1535 1085,1560 1595,1560 1650,1505 2025,1505 v1(2050,1530) ; C34.2@1712.44,2050 1712.44,1992.56 1734.84,1970.16 U10.18@1734.84,1928.74 U10.37@1771.26,1928.74 ; U6.2@1837.68,1160 v1(1870,1160) ; v1(1845,1080) 1894.08,1030.92 P5.5@1968.82,1030.92 ; U10.37@1909.06,1930 U10.26@1909.06,1965.16 1909.06,1994.06 1932.44,2017.44 C35.2@1932.44,2050 ; U11.3@1909.69,1274.45 1909.69,1230.31 1930,1210 2035,1210 v1(2076.28,1168.72) 2117.56,1127.44 R16.2@2160,1127.44 C29.2@2220,1127.44 2220,1134.95 2245.05,1160 2370,1160 2380,1150 P6.2@2380,1120 2380,1080 2337.56,1037.56 C30.2@2337.56,1000 ; U10.37@1928.74,1771.26 U10.36@1965.16,1771.26 1998.74,1771.26 2025,1745 2025,1725 2040.12,1709.88 2077.56,1709.88 C33.2@2077.56,1645 ; C27.2@2397.56,1445 2397.56,1382.44 2422.44,1357.56 v1(2510,1357.56)
  other v1: 1620,2275 1880,2340 2150,2340 2350,2340 1550,2400 1825,2540 1885,2540 2165,2600 2225,2600 2355,2600 1550,2615 1600,2615 1650,2615 1700,2615 1750,2615 1800,2615 2165,2650 2225,2650 2355,2650 1550,2655 1600,2655 1650,2655 1700,2655 1750,2655 1800,2655
  other v2: 1846.69,1321.69 1890,1321.69 1933.31,1321.69 1846.69,1365 1890,1365 1933.31,1365 1846.69,1408.31 1890,1408.31 1933.31,1408.31 1779.13,1779.13 1826.38,1779.13 1873.62,1779.13 1920.87,1779.13 1779.13,1826.38 1826.38,1826.38 1873.62,1826.38 1920.87,1826.38 1779.13,1873.62 1826.38,1873.62 1873.62,1873.62 1920.87,1873.62 1779.13,1920.87 1826.38,1920.87 1873.62,1920.87 1920.87,1920.87 1945.04,2155.04 1988.35,2155.04 2031.65,2155.04 2074.96,2155.04 1945,2200 1988,2200 2032,2200 2075,2200 1945.04,2241.65 1988.35,2241.65 2031.65,2241.65 2074.96,2241.65 1945.04,2284.96 1988.35,2284.96 2031.65,2284.96 2074.96,2284.96
GND: B1.2 C22.2 C23.2 C24.2 C28.2 C31.2 C32.2 Q1.2 Q2.2 Q3.2 Q4.2 Q5.2 R1.2 R2.2 R3.2 R4.2 R10.1 R17.1 R18.2 R19.2 R20.2 R21.2 R24.2 R25.2 R26.2 R27.2 S1.1 U5.2 U7.4 U7.8 U7.17 U8.2 U9.2 | length 3260.1
  Top Layer w8: v1(1150,1050) 1172.44,1072.44 R21.2@1172.44,1100 R20.2@1172.44,1160 ; v1(1172.44,1220) 1145,1220 1130,1235 1130,1295 1145,1310 R18.2@1172.44,1310 ; v1(1280,1432.44) 1280,1453.62 1301.38,1475 1355,1475 1377.56,1452.44 R25.2@1377.56,1430 ; C22.2@1325,1367.56 C23.2@1455,1367.56 1455,1405 1425,1435 R25.2@1382.56,1435 ; U7.4@1419.53,1134.88 1419.53,1105.47 1440,1085 v1(1485,1085) R24.2@1602.44,1085 ; U7.8@1445.12,1219.53 1489.53,1219.53 v1(1505,1235) ; S1.1@1719.8,934.8 1760.2,934.8 1776.02,918.98 1776.02,891.49 1789.95,877.56 2042.56,877.56 2050,885 ; v1(2050,922.76) 2050,885 ; R27.2@2180,942.44 2180,885 2165,870 2065,870 2050,885
  Top Layer w20: R3.2@932.44,1150 v1(932.44,1090) 932.44,1032.98 Q3.2@956.26,1009.16 ; R1.2@987.56,2550 1025,2550 1050,2575 v5(1050,2655) 1050,2702.89 Q1.2@1009.16,2743.74 ; v1(2670,935.42) Q4.2@2690.84,956.26 2650,997.11 2650,1125 2675,1150 R4.2@2712.44,1150 ; v5(2690.84,2690.84) Q2.2@2743.74,2690.84 2767.56,2667.02 R2.2@2767.56,2550
  Bottom Layer w8: v1(1172.44,1220) 1176.18,1216.26 Q5.2@1202.4,1216.26 1316.26,1216.26 1340,1240 C24.2@1340,1282.44 1372.56,1315 U5.2@1457.76,1315 ; U8.2@2397.24,1250 2510,1250 R17.1@2510,1302.44 2557.56,1302.44 2572.44,1287.56 C32.2@2572.44,1250 v1(2572.44,1190)
  Bottom Layer w20: C31.2@1607.56,1010 1607.56,982.44 1630,960 B1.2@1630,930
  other v2: 1368.35,1168.35 1411.65,1168.35 1368.35,1211.65 1411.65,1211.65
HMC_INT: U2.15 U10.32 | length 1240
  Top Layer w8: v1(1340.16,1620.16) U2.15@1340.16,1664.96 ; v1(2050,1865) 2075,1840 v1(2075,1575)
  Bottom Layer w8: v1@1340.16,1624.84 v1(1340.16,1620.16) 1360.31,1600 1585,1600 1665,1520 1945,1520 1980,1555 2055,1555 v1(2075,1575) ; U10.32@1965.16,1850 2035,1850 v1(2050,1865)
MPU_IIC_SCL: U1.7 U2.1 | length 327.3
  Top Layer w8: U2.1@1285.04,1629.53 1285.04,1885.04 1300.79,1900.79 U1.7@1300.79,1950.28
MPU_IIC_SDA: U1.6 U2.16 | length 438.3
  Top Layer w8: v1(1240,1735) 1225,1750 1225,1965 1240.79,1980.79 U1.6@1270.28,1980.79 ; v1(1320,1735) 1320.47,1734.53 U2.16@1320.47,1664.96
  Bottom Layer w8: v1(1240,1735) v1(1320,1735)
MPU_INT: U1.12 U10.31 | length 977
  Top Layer w8: U1.12@1399.21,1950.28 1399.21,1920.79 1405,1915 v1(1465,1915) ; v1(1695,1950) 2095,1950 2125,1920 v1(2125,1900)
  Bottom Layer w8: v1(1465,1915) 1500,1950 v1(1695,1950) ; U10.31@1965.16,1869.68 2019.68,1869.68 2050,1900 v1(2125,1900)
NetA1_1: A1.1 C16.1 L1.2 | length 156.4
  Top Layer w8: L1.2@2019.69,2620 C16.1@2072.44,2620
  Top Layer w30: L1.2@2019.69,2620 A1.1@2019.69,2723.68
NetC1_1: C1.1 U1.20 | length 58.2
  Top Layer w8: U1.20@1379.53,2109.72 C1.1@1379.53,2167.91
NetC2_1: C2.1 U2.12 | length 358.7
  Top Layer w8: U2.12@1414.96,1629.53 1439.53,1629.53 1450,1640 1450,1700 1460,1710 1520,1710 1532.56,1697.44 C2.1@1532.56,1530
NetC2_2: C2.2 U2.8 | length 166.6
  Top Layer w8: U2.8@1379.53,1535.04 1379.53,1500.47 1390,1490 1460,1490 1477.44,1507.44 C2.2@1477.44,1530
NetC4_1: C4.1 U2.10 | length 86.2
  Top Layer w8: U2.10@1414.96,1590.16 1497.28,1590.16 C4.1@1500,1587.44
NetC7_1: C7.1 U1.10 | length 180.8
  Top Layer w8: U1.10@1359.84,1950.28 1359.84,1900.16 1385,1875 1435,1875 1447.44,1862.56 C7.1@1447.44,1835
NetC9_1: C9.1 U4.37 Y1.1 | length 477.3
  Top Layer w8: C9.1@1610,2572.56 1647.44,2572.56 1681.26,2538.74 Y1.1@1740,2538.74 1740,2482.02 1797.24,2424.77 1797.24,2342.76 1833.39,2306.61 U4.37@1895.83,2306.61
NetC10_1: C10.1 U4.38 Y1.2 | length 331.6
  Top Layer w8: C10.1@1610,2402.56 1647.44,2402.56 1668.74,2381.26 Y1.2@1740,2381.26 ; Y1.2@1740,2380 1829.13,2290.87 U4.38@1895.83,2290.87
NetC11_1: C11.1 U4.39 | length 130.3
  Top Layer w8: C11.1@1767.56,2280 1772.44,2275.12 U4.39@1895.83,2275.12
NetC14_1: C14.1 L2.1 U4.32 | length 203.4
  Top Layer w8: C14.1@1920,2432.44 1920,2395 1935,2380 1986.38,2380 ; L2.1@1980.31,2425 1986.38,2418.94 1986.38,2380 ; U4.32@1986.38,2334.17 1986.38,2380
NetC14_2: C14.2 C15.1 L1.1 | length 196.2
  Top Layer w8: C14.2@1920,2487.56 1917.56,2490 C15.1@1917.56,2620 L1.1@1980.31,2620
NetC18_1: C18.1 U4.29 | length 111.9
  Top Layer w8: U4.29@2033.62,2334.17 2033.62,2353.62 2072.44,2392.44 C18.1@2072.44,2430
NetC19_1: C19.1 L3.2 U4.30 | length 375.9
  Top Layer w8: L3.2@1980.31,2530 1980.31,2555.31 2000,2575 2050,2575 2072.44,2552.56 C19.1@2072.44,2530 2072.44,2483.46 2046.69,2457.72 2046.69,2396.69 2017.87,2367.87 U4.30@2017.87,2334.17
NetC20_2: C20.2 R7.2 R9.1 U5.5 | length 495.3
  Bottom Layer w8: R9.1@1575,1432.44 1575,1451.81 1566.81,1460 1494.95,1460 1487.28,1452.33 1487.28,1412.55 1515,1384.83 1515,1325 1525,1315 U5.5@1552.24,1315 1645,1315 1660,1300 R7.2@1660,1272.56 C20.2@1720,1272.56
NetC24_1: C24.1 R8.2 U5.1 U5.3 | length 334.5
  Bottom Layer w8: R8.2@1280,1337.56 C24.1@1340,1337.56 1382.56,1337.56 1397.4,1352.4 U5.3@1457.76,1352.4 1492.6,1352.4 1500,1345 1500,1285 1492.6,1277.6 U5.1@1457.76,1277.6
NetC25_1: C25.1 U5.4 | length 108
  Bottom Layer w8: C25.1@1515,1432.44 1539.84,1432.44 1547.28,1425 U5.4@1547.28,1352.4
NetC26_2: C26.2 R11.2 R15.1 R16.1 U8.5 | length 401.6
  Bottom Layer w8: R16.1@2160,1182.56 2160,1235 2175,1250 ; R15.1@2162.44,1445 R11.2@2162.44,1385 C26.2@2162.44,1325 2162.44,1262.56 2175,1250 ; U8.5@2302.76,1250 2175,1250
NetC29_1: C29.1 U8.4 | length 108.3
  Bottom Layer w8: C29.1@2220,1182.56 2220,1205 2227.6,1212.6 U8.4@2302.76,1212.6
NetC38_1: C38.1 U10.2 Y2.1 | length 680.2
  Bottom Layer w8: U10.2@1909.06,1734.84 1909.06,1705.94 1925,1690 1925,1640 1947.72,1617.28 2097.45,1617.28 2125,1644.83 2125,1755 2158.74,1788.74 Y2.1@2225,1788.74 2296.26,1788.74 2317.56,1767.44 C38.1@2350,1767.44
NetC39_1: C39.1 U10.3 Y2.2 | length 595.8
  Bottom Layer w8: U10.3@1889.37,1734.84 1889.37,1690.63 1900,1680 1900,1635 1931.72,1603.28 2118.28,1603.28 2146.26,1631.26 Y2.2@2225,1631.26 2293.74,1631.26 2325.47,1599.53 C39.1@2349.44,1599.53 ; Y2.2@2222.02,1603.28 Y2.2@2225,1606.26
NetC40_1: C40.1 U10.4 | length 96.3
  Bottom Layer w8: C40.1@1860,1642.56 1860,1675 1869.69,1684.69 U10.4@1869.69,1734.84
NetC41_1: C41.1 U11.6 | length 158.2
  Top Layer w8: C41.1@1800,1137.56 v1(1800,1175)
  Bottom Layer w8: v1(1800,1175) 1811.93,1186.93 1811.93,1201.93 1850,1240 U11.6@1850,1275.08
NetD1_1: D1.1 P1.2 Q1.3 | length 219.3
  Top Layer w20: D1.1@751.21,2911.21 P1.2@800.1,2862.32
  Top Layer w40: P1.2@800.1,2862.32 833.42,2829 871,2829 Q1.3@917.29,2782.71
NetD2_1: D2.1 P2.1 Q2.3 | length 217.1
  Top Layer w20: P2.1@2899.9,2862.32 D2.1@2948.79,2911.21
  Top Layer w40: Q2.3@2782.71,2782.71 2835,2835 2870.36,2835 P2.1@2897.68,2862.32
NetD3_1: D3.1 P3.1 Q3.3 | length 219.3
  Top Layer w20: D3.1@751.21,788.79 P3.1@800.1,837.68
  Top Layer w40: P3.1@800.1,837.68 827.42,865 865,865 Q3.3@917.29,917.29
NetD4_1: D4.1 P4.2 Q4.3 | length 217.1
  Top Layer w20: P4.2@2899.9,837.68 D4.1@2948.79,788.79
  Top Layer w40: Q4.3@2782.71,917.29 2835,865 2870.36,865 P4.2@2897.68,837.68